# Altium PCB gen1.PcbDoc
Units mil, origin at the board's own origin, x right, y up, seen from the top; angles counter-clockwise.
Board outline 1413.32 x 1574.8 mil, 2 copper layers (Top Layer, Bottom Layer); 60 components, 48 nets, 279 pads, 102 vias.
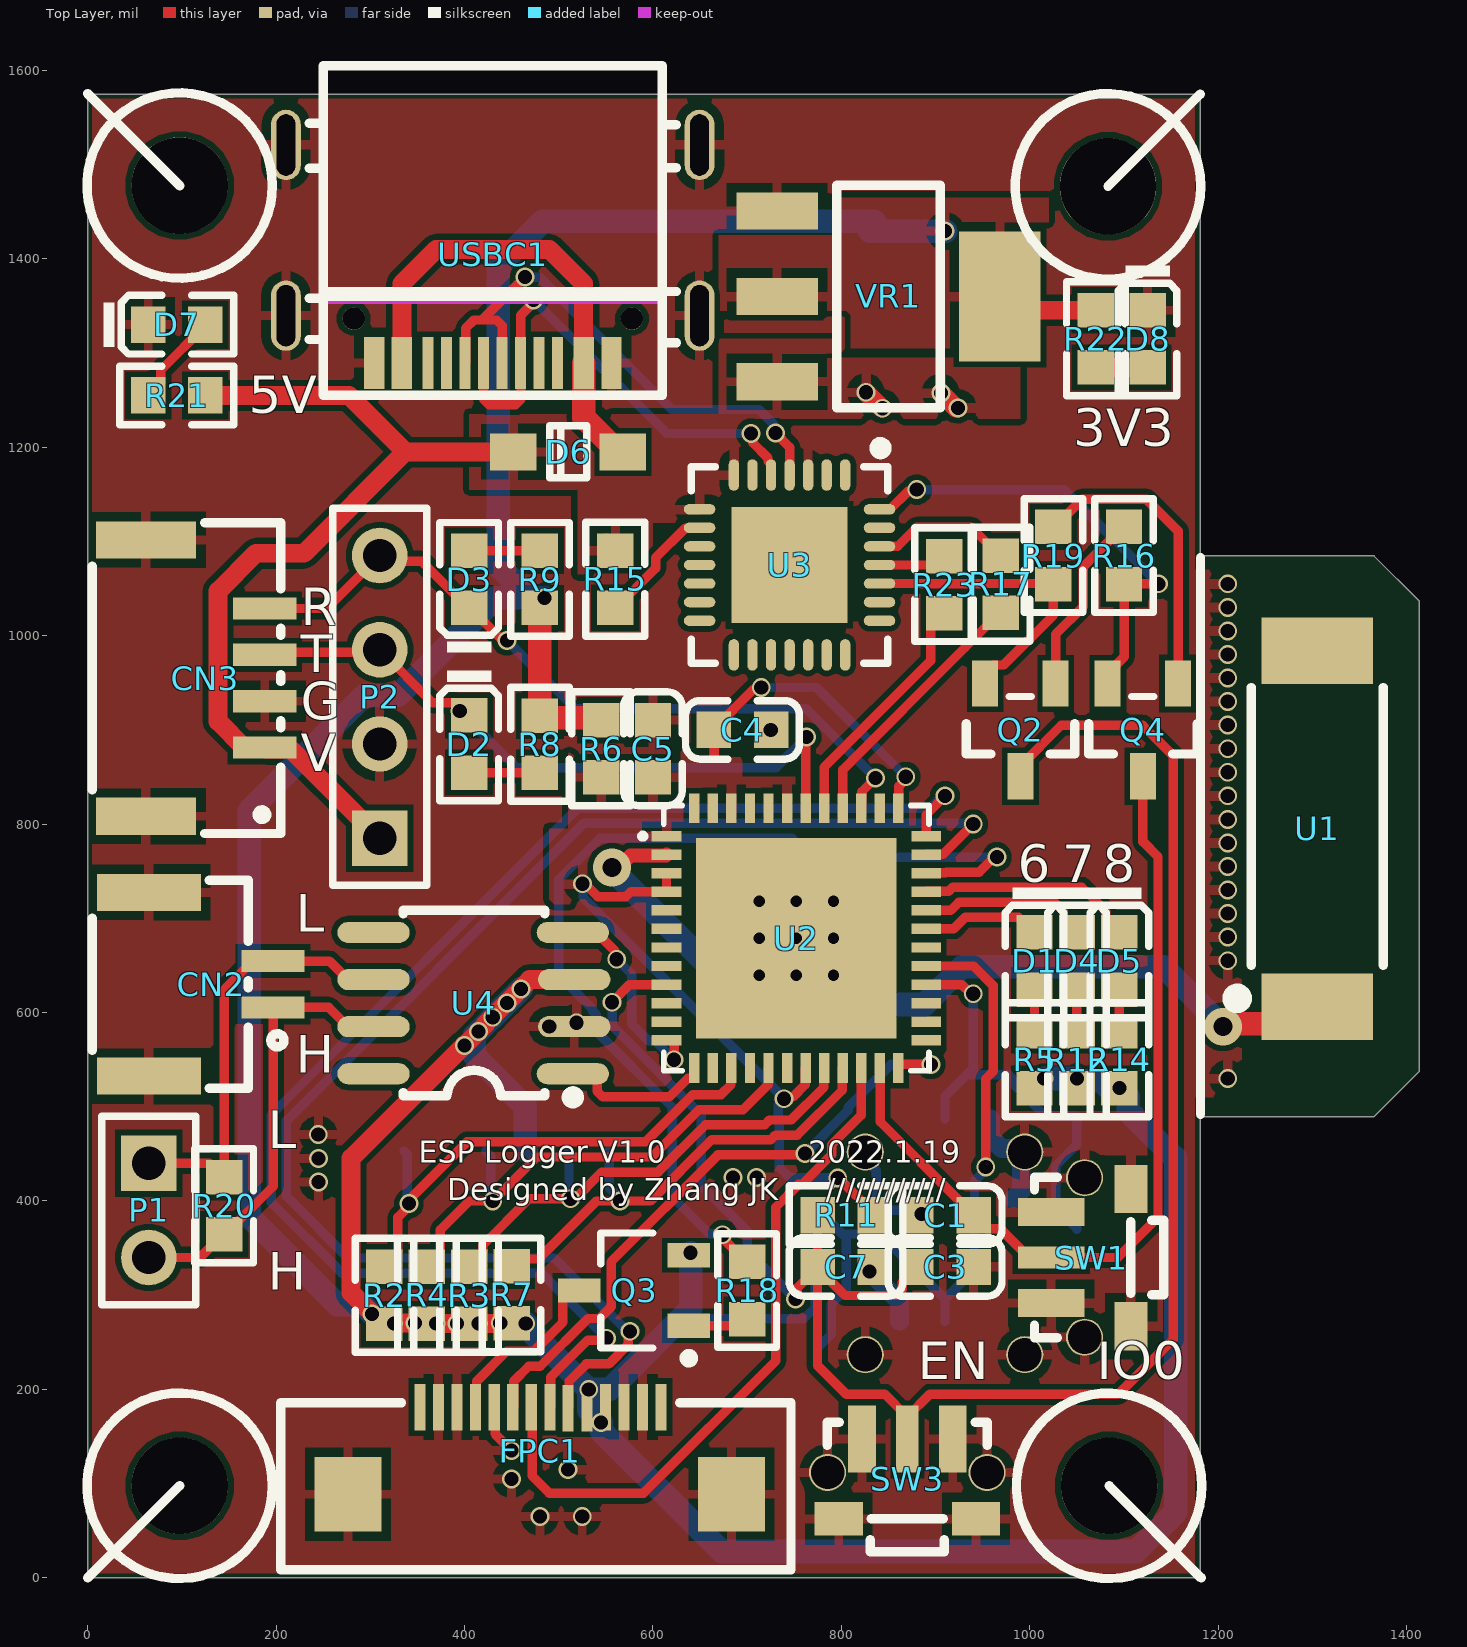
[diagram p0: Top Layer view]
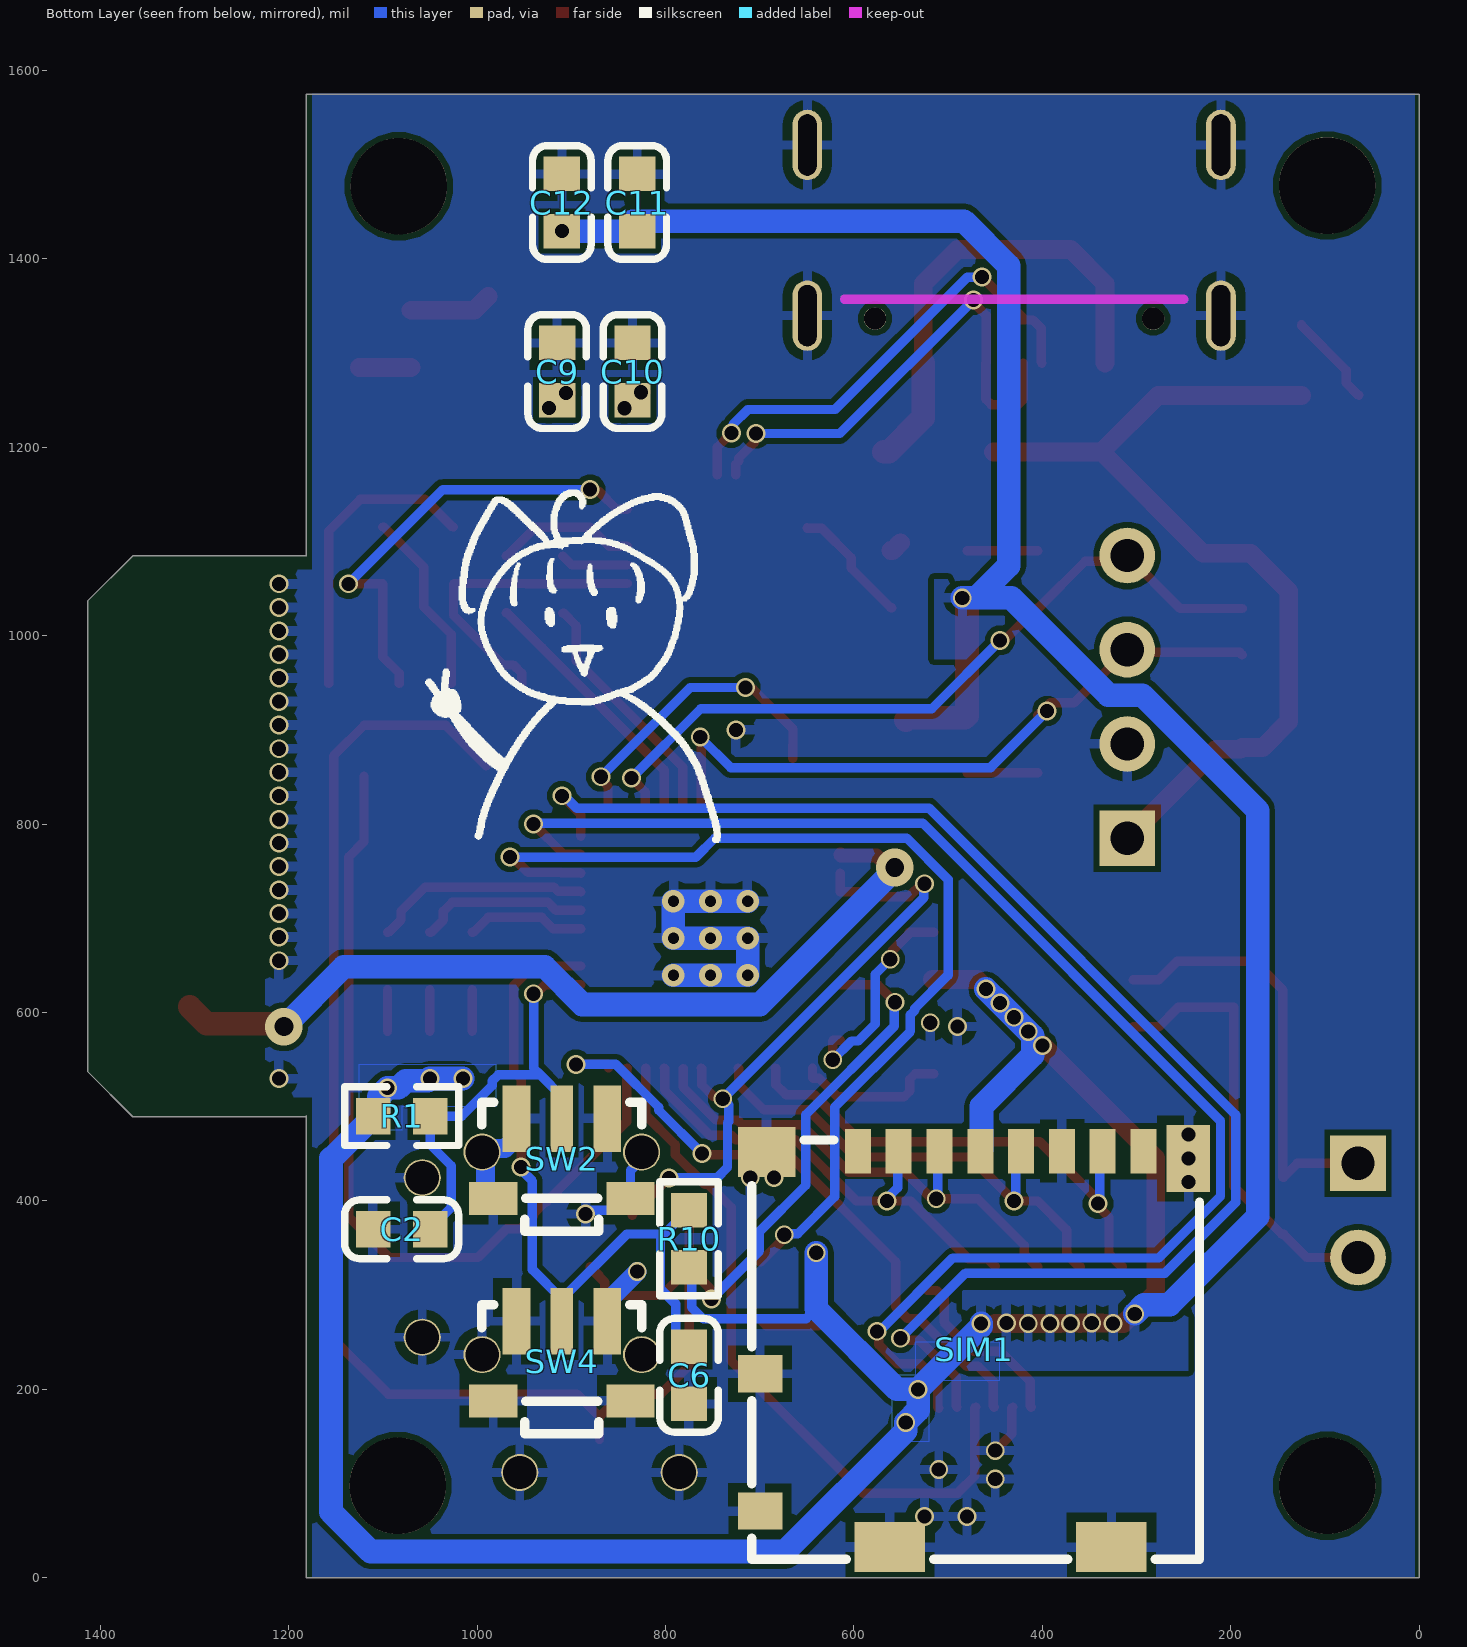
[diagram p1: Bottom Layer view, seen from below]
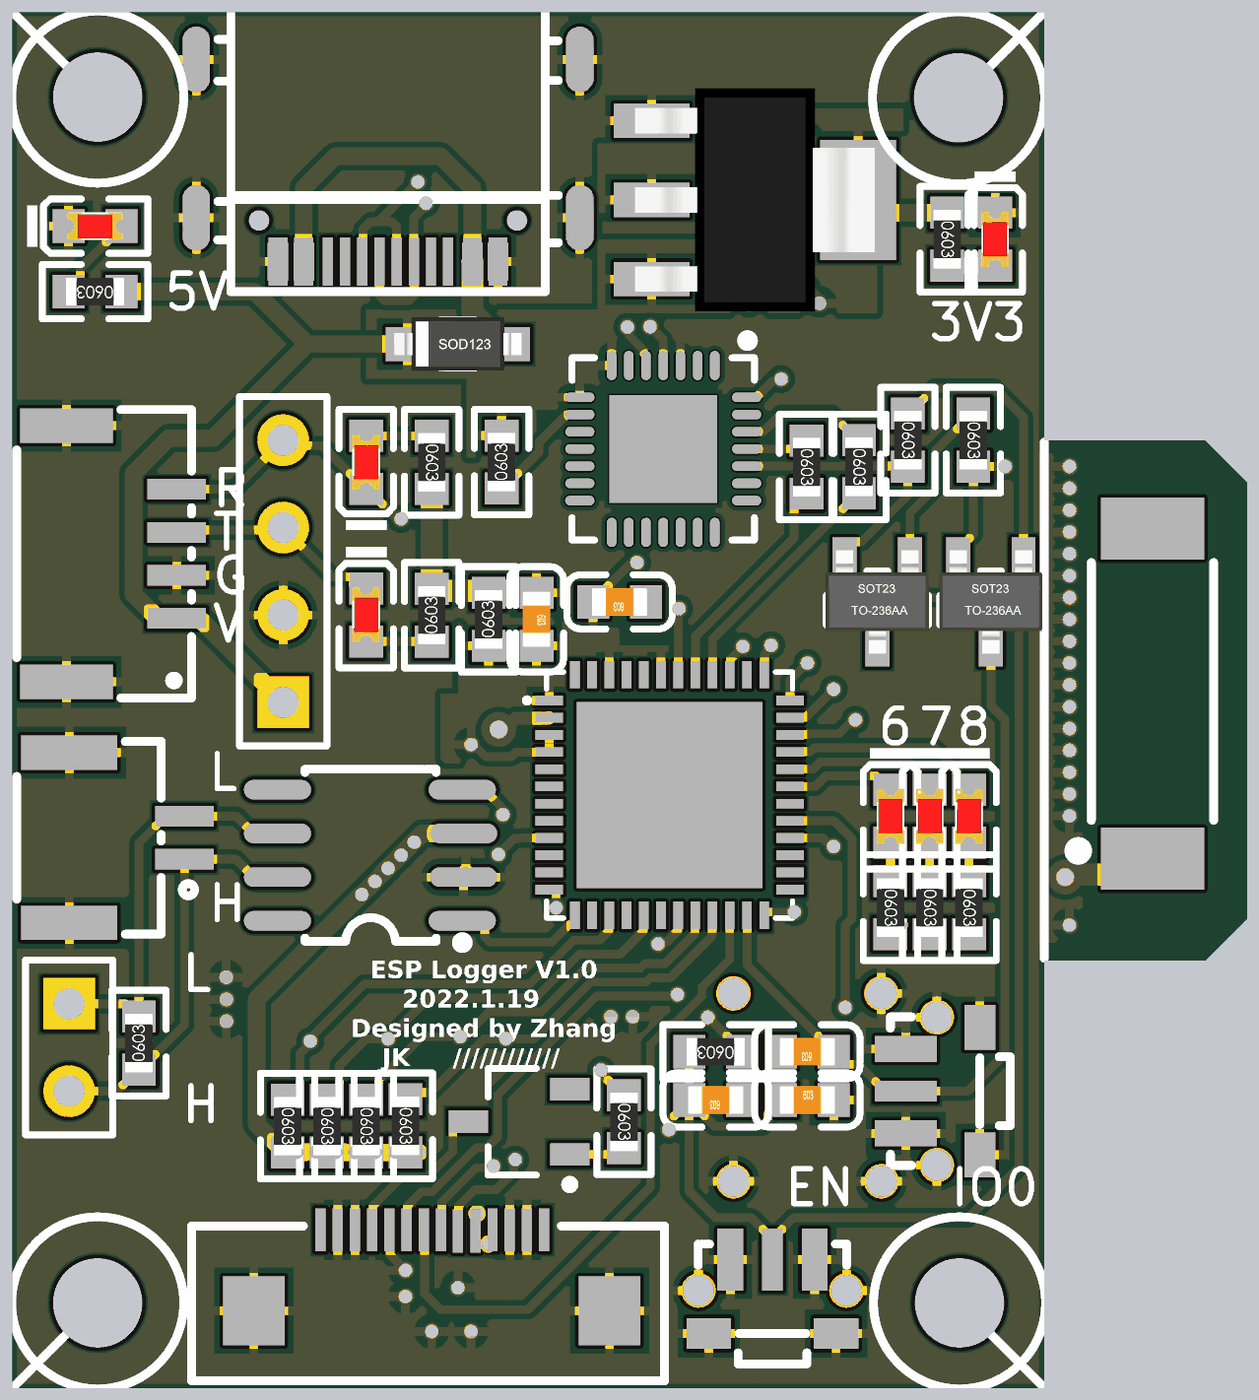
[diagram p2: 3D render of the assembled board from above, using the file's embedded part models]
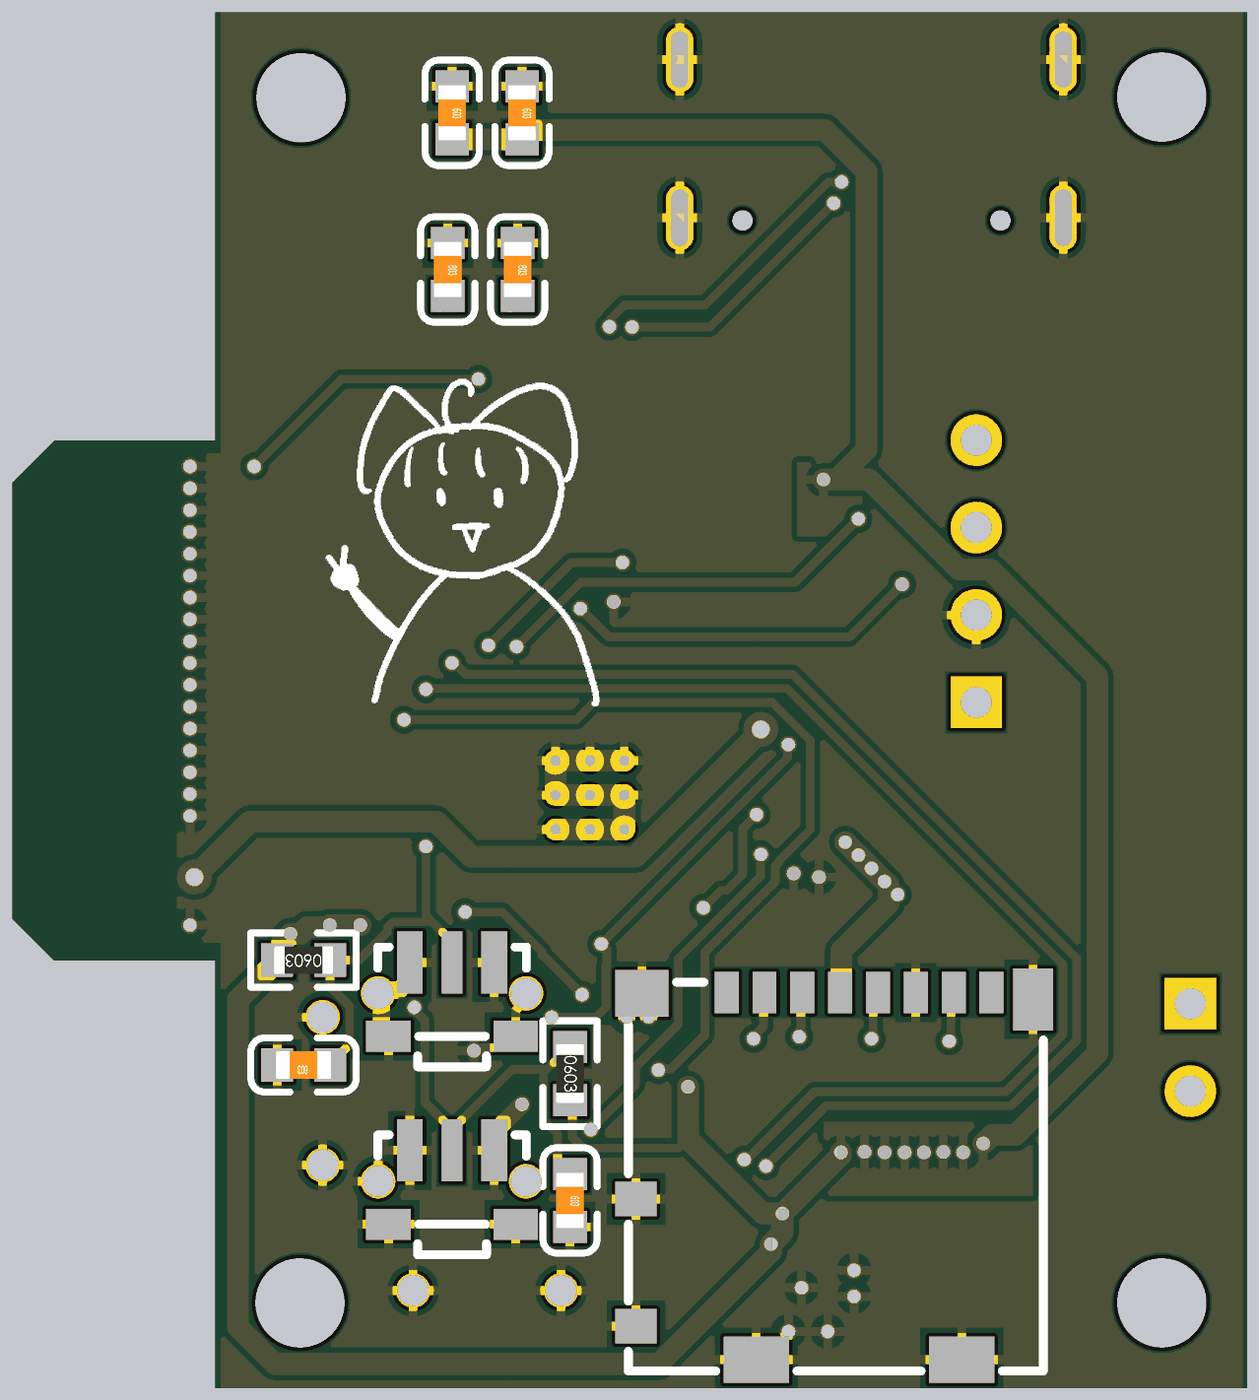
[diagram p3: 3D render of the assembled board from below, using the file's embedded part models]

## Layer stack, top to bottom
Top Solder: solder mask 0.4, Solder Resist, Dk 3.5
Top Layer: signal copper 1.4
Dielectric 1: dielectric 12.6, FR-4, Dk 4.8
Bottom Layer: signal copper 1.4
Bottom Solder: solder mask 0.4, Solder Resist, Dk 3.5

## Board outline
0,0 0,1574.8 1181.1,1574.8 1181.1,1084.61 1181.12,1084.59 1365.41,1084.59 1413.32,1036.68 1413.32,537.31 1365.41,489.4 1181.12,489.4 1181.1,490.67 1181.1,0

## Design rules (kind name [scope] priority, off if disabled: settings)
Clearance [All] p1: gap=6 ignorepadtopadclearanceinfootprint=FALSE
HoleSize [All] p1: absolutevalues=TRUE maxlimit=200 minlimit=1 maxpercent=80.000 minpercent=20.000
HoleToHoleClearance [All] p1: gap=6 allowstackedmicrovias=TRUE
MinimumSolderMaskSliver [All] p1: minsoldermaskwidth=-1
PolygonConnect [All] p1: connectstyle=Relief reliefconductorwidth=10 reliefentries=4 polygonreliefangle="90 Angle" airgapwidth=10
RoutingVias [All] p1: holewidth=10 width=20 viastyle="Through Hole" minholewidth=10 minwidth=20 maxholewidth=40 maxwidth=80
SilkToSilkClearance [All] p1: silktosilkclearance=-1
SilkToSolderMaskClearance [IsPad] p1: minsilkscreentomaskgap=-1 clearancetoexposedcopper=TRUE
SolderMaskExpansion [All] p1: expansion=4 istentingtop=FALSE
Width [All] p1: maxlimit=100 minlimit=8 preferedwidth=10
25 further rules are at their usual default settings.

## Components (designator, comment, footprint, x,y, rotation, side; value= is the part's Value field where it differs from the comment)
C1 "100nF (104) 10% 50V" 0603_C 910,385 r180 top
C2 "100nF" 0603_C 1080,370 r0 bottom
C3 "100nF (104) 10% 50V" 0603_C 910,330 r0 top
C4 "10uF" 0603_C 695,900 r180 top
C5 "100nF" 0603_C 600,880 r270 top
C6 "100nF" 0603_C 775,215 r270 bottom
C7 "100nF" 0603_C 805,330 r180 top
C9 "100nF" 0603_C 915,1280.32 r270 bottom
C10 "10uF" 0603_C 835,1280.32 r270 bottom
C11 "10uF" 0603_C 830,1459.68 r270 bottom
C12 "100nF" 0603_C 910,1459.68 r270 bottom
CN2 "M1257VS-02P" CONN-SMD_P1.25_M1257VS-02P 131,630 r270 top
CN3 "M1257RS-04P" CONN-SMD_M1257RS-04P 125,955 r270 top
D1 "红灯 0603" 0603_LED_S1 1005,654.69 r270 top
D2 "蓝灯 0603" 0603_LED_S1 405,885 r270 top
D3 "绿灯 0603" 0603_LED_S1 405,1059.68 r90 top
D4 "黄灯 0603" 0603_LED_S1 1050,654.69 r270 top
D5 "绿灯 0603" 0603_LED_S1 1095,654.69 r270 top
D6 "B5819W  SL" SOD-123 510,1195 r0 top
D7 "红灯 0603" 0603_LED_S1 94.68,1330 r0 top
D8 "红灯 0603" 0603_LED_S1 1125,1315 r270 top
FPC1 "F0502WR-S-14PNLNG1G00L" FPC-SMD_P0.50-14P_F0500WR-S 480,135 r180 top
P1 "Header 2" HDR1X2 65,440 r270 top
P2 "Header 4" HDR1X4 310,785 r90 top
Q2 "MMBT5551  G1" SOT-23(SOT-23-3) 990,900 r90 top
Q3 "AO3401A PMOS" SOT-23-3L 580,305 r0 top
Q4 "MMBT5551  G1" SOT-23(SOT-23-3) 1120,900 r90 top
R1 "1KΩ" 0603_R#1 1080,490 r0 bottom
R2 "10KΩ (1002) ±1%" 0603_R#1 315,300 r270 top
R3 "10KΩ (1002) ±1%" 0603_R#1 405,300 r270 top
R4 "10KΩ (1002) ±1%" 0603_R#1 360,300 r270 top
R5 "1KΩ" 0603_R#1 1005,550 r270 top
R6 "0Ω (0R0) ±1%" 0603_R#1 545,880 r90 top
R7 "10KΩ (1002) ±1%" 0603_R#1 450,300.32 r270 top
R8 "1KΩ (1001) ±1%" 0603_R#1 480,884.68 r90 top
R9 "1KΩ (1001) ±1%" 0603_R#1 480,1059.69 r270 top
R10 "1KΩ" 0603_R#1 775,360 r270 bottom
R11 "10KΩ (1002) ±1%" 0603_R#2 805,385 r180 top
R12 "1KΩ" 0603_R#1 1050,550 r270 top
R14 "1KΩ" 0603_R#1 1095,550 r270 top
R15 "10KΩ (1002) ±1%" 0603_R#1 560,1060 r90 top
R16 "12KΩ (1202) ±1%" 0603_R#1 1100,1085 r270 top
R17 "200Ω (2000) ±1%" 0603_R#1 969.06,1054.53 r270 top
R18 "1KΩ (1001) ±1%" 0603_R#1 700,305 r270 top
R19 "12KΩ (1202) ±1%" 0603_R#1 1025,1085 r270 top
R20 "120Ω (1200) ±1%" 0603_R#1 145,395 r90 top
R21 "1KΩ (1001) ±1%" 0603_R#1 94.69,1255 r180 top
R22 "1KΩ (1001) ±1%" 0603_R#1 1070,1315 r270 top
R23 "200Ω (2000) ±1%" 0603_R#1 909.06,1054.21 r270 top
SIM1 "MicroSD Socket" SIM-SMD_8P-1040310811 472.26,242.74 r0 bottom
SW1 "ST-1133" KEY-SMD_ST-1133 1065,340 r90 top
SW2 "ST-1133" KEY-SMD_ST-1133 910,445 r180 bottom
SW3 "ST-1133" KEY-SMD_ST-1133 870,105 r0 top
SW4 "ST-1133" KEY-SMD_ST-1133 910,230 r180 bottom
U1 "AN1003" ANT-SMD_L10.3-W3.0 1305,795 r90 top
U2 "ESP32-PICO-D4" QFN-48_L7.0-W7.0-P0.50-BL-EP5.4 752.21,678.89 r270 top
U3 "CP2102-GMR" QFN-28_5x5x05P 745,1075 r180 top
U4 "SN65HVD232DR" SOIC-8_L5.0-W4.0-P1.27-LS6.0-BL 410,610 r90 top
USBC1 "TYPE-C-31-M-14" USB-C-SMD_12P-P0.50-H-F_TYPE-C-31-M-14 430,1405 r180 top
VR1 "AMS1117-3.3" SOT-223 850,1360 r180 top

## Footprints (in the part's own frame and the unit in brackets; to place one, negate y for a bottom-side part, rotate by r counter-clockwise, add the part's x,y. Pads: shape width x height; smd on the part's side, far side on the other; paste and mask are expansions set on the pad)
0603_C [mm]
  rect 0.93x0.98 smd: 1(-0.77,0) 2(0.77,0)
  silkscreen extent -1.54,-0.79 1.54,0.79, body extent -0.8,-0.4 0.8,0.4, height 0.3
0603_LED_S1 [mm]
  rect 0.93x0.98 smd: A(0.77,0) K(-0.77,0)
  silkscreen extent -1.98,-0.79 1.54,0.79, body extent -0.8,-0.4 0.8,0.4, height 0.6
0603_R#1 [mm]
  rect 0.93x0.98 smd: 1(-0.77,0) 2(0.77,0)
  silkscreen extent -1.53,-0.79 1.54,0.79, body extent -0.85,-0.4 0.85,0.4, height 0.56
0603_R#2 [mm]
  rect 0.93x0.98 smd: 1(-0.77,0) 2(0.762,0)
  silkscreen extent -1.54,-0.79 1.54,0.79, body extent -0.85,-0.4 0.85,0.4, height 0.56
ANT-SMD_L10.3-W3.0 [mm]
  rect 1.8x3 smd: 1(-4.8,0) 2(4.8,0)
  silkscreen extent -4.77,-1.78 3.81,2.36
CONN-SMD_M1257RS-04P [mm]
  rect 0.6x1.7 smd: 1(1.875,1.6) 2(0.625,1.6) 3(-0.625,1.6) 4(-1.875,1.6)
  rect 1x2.7 smd: 5(-3.725,-1.6) 6(3.725,-1.6)
  silkscreen extent -4.19,-3.05 4.19,2.03
CONN-SMD_P1.25_M1257VS-02P [mm]
  rect 0.6x1.7 smd: 1(0.625,1.675) 2(-0.625,1.675)
  rect 1x2.8 smd: 3(-2.475,-1.675) 4(2.475,-1.675)
  silkscreen extent -2.8,-3.2 2.8,1.97
FPC-SMD_P0.50-14P_F0500WR-S [mm]
  rect 0.3x1.25 smd: 1(3.231,-1.175) 2(2.731,-1.175) 3(2.231,-1.175) 4(1.731,-1.175) 5(1.231,-1.175) 6(0.731,-1.175) 7(0.231,-1.175) 8(-0.269,-1.175) 9(-0.762,-1.143) 10(-1.27,-1.143) 11(-1.769,-1.175) 12(-2.269,-1.175) 13(-2.769,-1.175) 14(-3.269,-1.175)
  rect 1.8x2 smd: 15(5.169,1.175) 16(-5.169,1.175)
  silkscreen extent -6.77,-1.29 6.98,3.21
HDR1X2 [mm] "Connector; Header; 2 Position"
  rect 1.5x1.5 hole 0.9: 1(0,0)
  round 1.5 hole 0.9: 2(2.54,0)
  silkscreen extent -1.27,-1.27 3.81,1.27
HDR1X4 [mm] "Connector; Header; 4 Position"
  rect 1.5x1.5 hole 0.9: 1(0,0)
  round 1.5 hole 0.9: 2(2.54,0) 3(5.08,0) 4(7.62,0)
  silkscreen extent -1.27,-1.27 8.89,1.27
KEY-SMD_ST-1133 [mm]
  round 1 hole 0.9: 1(-2.15,0.175) 3(2.15,0.175)
  rect 1.3x0.9 smd: 1(-1.85,-1.075) 3(1.85,-1.075)
  rect 0.75x1.8 smd: 1(-1.225,1.075) 3(1.225,1.075)
  rect 0.6x1.8 smd: 2(0,1.075)
  silkscreen extent -2.16,-1.96 2.16,1.52
QFN-28_5x5x05P [mm]
  rect 3.13x3.13 smd mask+0.051: 0(0,0)
  oval 0.28x0.85 smd mask+0.051: 1(-1.5,-2.425) 2(-1,-2.425) 3(-0.5,-2.425) 4(0,-2.425) 5(0.5,-2.425) 6(1,-2.425) 7(1.5,-2.425) 15(1.5,2.425) 16(1,2.425) 17(0.5,2.425) 18(0,2.425) 19(-0.5,2.425) 20(-1,2.425) 21(-1.5,2.425)
  oval 0.85x0.28 smd mask+0.051: 8(2.425,-1.5) 9(2.425,-1) 10(2.425,-0.5) 11(2.425,0) 12(2.425,0.5) 13(2.425,1) 14(2.425,1.5) 22(-2.425,1.5) 23(-2.425,1) 24(-2.425,0.5) 25(-2.425,0) 26(-2.425,-0.5) 27(-2.425,-1) 28(-2.425,-1.5)
  silkscreen extent -2.65,-3.3 2.65,2.65
QFN-48_L7.0-W7.0-P0.50-BL-EP5.4 [mm]
  rect 0.28x0.8 smd: 1(-2.75,-3.5) 2(-2.25,-3.5) 3(-1.75,-3.5) 4(-1.25,-3.5) 5(-0.75,-3.5) 6(-0.25,-3.5) 7(0.25,-3.5) 8(0.75,-3.5) 9(1.25,-3.5) 10(1.75,-3.5) 11(2.25,-3.5) 12(2.75,-3.5) 25(2.75,3.5) 26(2.25,3.5) 27(1.75,3.5) 28(1.25,3.5) 29(0.75,3.5) 30(0.25,3.5) 31(-0.25,3.5) 32(-0.75,3.5) 33(-1.25,3.5) 34(-1.75,3.5) 35(-2.25,3.5) 36(-2.75,3.5)
  rect 0.8x0.28 smd: 13(3.5,-2.75) 14(3.5,-2.25) 15(3.5,-1.75) 16(3.5,-1.25) 17(3.5,-0.75) 18(3.5,-0.25) 19(3.5,0.25) 20(3.5,0.75) 21(3.5,1.25) 22(3.5,1.75) 23(3.5,2.25) 24(3.5,2.75) 37(-3.5,2.75) 38(-3.5,2.25) 39(-3.5,1.75) 40(-3.5,1.25) 41(-3.5,0.75) 42(-3.5,0.25) 43(-3.5,-0.25) 44(-3.5,-0.75) 45(-3.5,-1.25) 46(-3.5,-1.75) 47(-3.5,-2.25) 48(-3.5,-2.75)
  rect 5.4x5.4 smd: 49(0,0)
  silkscreen extent -3.58,-4.21 3.58,3.58
SIM-SMD_8P-1040310811 [mm]
  rect 0.7x1.2 smd: 1(3.138,-5.338) 2(2.038,-5.338) 3(0.938,-5.338) 4(-0.162,-5.338) 5(-1.262,-5.338) 6(-2.362,-5.338) 7(-3.462,-5.338) 8(-4.562,-5.337)
  rect 1.17x1.8 smd: 9(-5.772,-5.138)
  rect 1.55x1.35 smd: 10(5.598,-5.312)
  rect 1.2x1 smd: 11(5.773,0.663) 12(5.773,4.362)
  rect 1.9x1.35 smd: 13(2.273,5.337) 14(-3.697,5.337)
  silkscreen extent -6.07,-5.64 5.99,5.66
SOD-123 [mm]
  rect 1.25x1 smd: 1(1.475,0) 2(-1.475,0)
  silkscreen extent -0.5,-0.7 0.5,0.7, body extent -1.85,-0.77 1.85,0.78, height 1.35
SOIC-8_L5.0-W4.0-P1.27-LS6.0-BL [mil]
  oval 22.38x76.78 smd: 1(-75,-105) 2(-25,-106.5) 3(25,-106.5) 4(75,-105) 5(75,106.5) 6(25,106.5) 7(-25,106.5) 8(-75,106.5)
  silkscreen extent -106,-111 98,75
SOT-23(SOT-23-3) [mm]
  rect 1.25x0.7 smd: 1(1.25,-0.95) 2(1.25,0.95) 3(-1.25,0)
  silkscreen extent -0.65,-1.46 0.9,1.46, body extent -1.5,-1.5 1.5,1.5, height 1.3
SOT-23-3L [mm] "http://www.aosmd.com/res/packaging_information/SOT-23-3L.pdf"
  rect 1.15x0.65 smd: 1(1.475,-0.95) 2(1.475,0.95) 3(-1.475,0)
  silkscreen extent -0.9,-1.95 1.6,1.55, body extent -0.9,-1.55 0.9,1.55, height 1.25
SOT-223 [mm]
  rect 2.2x1 smd: 1(3,-2.3) 2(3,0) 3(3,2.3)
  rect 2.2x3.5 smd: 2(-3,0)
  silkscreen extent -1.4,-3 1.4,3, body extent -3.49,-3.24 3.49,3.24, height 1.64
USB-C-SMD_12P-P0.50-H-F_TYPE-C-31-M-14 [mm]
  rect 0.55x1.4 smd: A1B12(-3.2,2.94) A4B9(-2.45,2.94) B1A12(3.2,2.94) B4A9(2.45,2.94)
  rect 0.3x1.4 smd: A5(-1.249,2.94) A6(-0.251,2.94) A7(0.25,2.94) A8(1.25,2.94) B5(1.75,2.94) B6(0.75,2.94) B7(-0.751,2.94) B8(-1.749,2.94)
  oval 0.8x1.9 hole 0.5 slot 1.65 at 90 deg: S(-5.575,-2.94) S(-5.575,1.66) S(5.575,-2.94) S(5.575,1.66)
  round 0.6 hole 0.6 unplated: ""(-3.75,1.74) ""(3.75,1.74)
  Keep-Out Layer lines w0.254: 4.572,1.215 4.445,1.215 -4.572,1.215
  silkscreen extent -4.95,-5.08 4.95,3.81

## Part data
C1 C2 C3 C5 C6 C7 C9 C12: library part "0603 100nF (104) 10% 50V", "贴片电容", Package=0603, SuppliersPartNumber=C14663, ComponentLink1Description=供应商链接, ComponentLink1URL=http://www.szlcsc.com/product/details_15331.html, Supplier=LC
C4 C10 C11: library part "0603 10uF (106) 10% 10V", "贴片电容", Package=0603, SuppliersPartNumber=C19702, ComponentLink1Description=供应商链接, ComponentLink1URL=http://www.szlcsc.com/product/details_20411.html, Supplier=LC
CN2 CN3: BOM_JLCPCB Part Class="Extended Part", BOM_Manufacturer=XFCN, BOM_Supplier=LCSC, Contributor=LCSC, spicePre=C
  CN2: BOM_Manufacturer Part=M1257VS-02P, BOM_Supplier Part=C541819, spiceSymbolName=M1257VS-02P
  CN3: BOM_Manufacturer Part=M1257RS-04P, BOM_Supplier Part=C541828, spiceSymbolName=M1257RS-04P
D1 D7 D8: library part "0603 红灯", "发光二极管", Package=0603, SuppliersPartNumber=C2286, ComponentLink1Description=供应商链接, ComponentLink1URL=http://www.szlcsc.com/product/details_2659.html, Supplier=LC
D2: library part "0603 蓝灯", "发光二极管", Package=0603, SuppliersPartNumber=C72041, ComponentLink1Description=供应商链接, ComponentLink1URL=http://www.szlcsc.com/product/details_73150.html, Supplier=LC
D3 D5: library part "0603 绿灯", "发光二极管", Package=0603, SuppliersPartNumber=C72043, ComponentLink1Description=供应商链接, ComponentLink1URL=http://www.szlcsc.com/product/details_73152.html, Supplier=LC
D4: library part "0603 黄灯", "发光二极管", Package=0603, SuppliersPartNumber=C72038, ComponentLink1Description=供应商链接, ComponentLink1URL=http://www.szlcsc.com/product/details_73147.html, Supplier=LC
D6: library part "SOD-123 B5819W  SL", "肖特基二极管", Package=SOD-123, SuppliersPartNumber=C8598, ComponentLink1Description=供应商链接, ComponentLink1URL=http://www.szlcsc.com/product/details_9093.html, Supplier=LC
FPC1: BOM_JLCPCB Part Class="Extended Part", BOM_Manufacturer="Joint Tech Elec", BOM_Manufacturer Part=F0502WR-S-14PNLNG1G00L, BOM_Supplier=LCSC, BOM_Supplier Part=C247902, Contributor=LCSC, spicePre=F, spiceSymbolName=F0502WR-S-14PNLNG1G00L
P1: "Header, 2-Pin", LatestRevisionDate=17-Jul-2002, LatestRevisionNote="Re-released for DXP Platform.", Publisher="Altium Limited"
P2: "Header, 4-Pin", LatestRevisionDate=17-Jul-2002, LatestRevisionNote="Re-released for DXP Platform.", Publisher="Altium Limited"
Q2 Q4: library part "SOT-23 MMBT5551  G1", "三极管", Package=SOT-23, SuppliersPartNumber=C2145, ComponentLink1Description=供应商链接, ComponentLink1URL=http://www.szlcsc.com/product/details_2502.html, Supplier=LC
Q3: library part "AO3401A P道沟 X13A15 SOT-23", "MOS(场效应管)", Package=SOT-23, SuppliersPartNumber=C15127, ComponentLink1Description=供应商链接, ComponentLink1URL=http://www.szlcsc.com/product/details_15801.html, Supplier=LC
R1 R5 R8 R9 R10 R12 R14 R18 R21 R22: library part "0603 1KΩ (1001) 1%", "贴片电阻", Package=0603, SuppliersPartNumber=C21190, ComponentLink1Description=供应商链接, ComponentLink1URL=http://www.szlcsc.com/product/details_21904.html, Supplier=LC
R2 R3 R4 R7 R11 R15: library part "0603 10KΩ (1002) 1%", "贴片电阻", Package=0603, SuppliersPartNumber=C25804, ComponentLink1Description=供应商链接, ComponentLink1URL=http://www.szlcsc.com/product/details_26547.html, Supplier=LC
R6: library part "0603 0Ω (0R0) 1%", "贴片电阻", Package=0603, SuppliersPartNumber=C21189, ComponentLink1Description=供应商链接, ComponentLink1URL=http://www.szlcsc.com/product/details_21903.html, Supplier=LC
R16 R19: library part "0603 12KΩ (1202) 1%", "贴片电阻", Package=0603, SuppliersPartNumber=C22790, ComponentLink1Description=供应商链接, ComponentLink1URL=http://www.szlcsc.com/product/details_23517.html, Supplier=LC
R17 R23: library part "0603 200Ω (2000) 1%", "贴片电阻", Package=0603, SuppliersPartNumber=C8218, ComponentLink1Description=供应商链接, ComponentLink1URL=http://www.szlcsc.com/product/details_8708.html, Supplier=LC
R20: library part "0603 120Ω (1200) 1%", "贴片电阻", Package=0603, SuppliersPartNumber=C22787, ComponentLink1Description=供应商链接, ComponentLink1URL=http://www.szlcsc.com/product/details_23514.html, Supplier=LC
SIM1: library part 1040310811, BOM_JLCPCB Part Class="Extended Part", BOM_Manufacturer=MOLEX, BOM_Manufacturer Part=1040310811, BOM_Supplier=LCSC, BOM_Supplier Part=C585350, Contributor=LCSC, spicePre=S, spiceSymbolName=1040310811
SW1 SW2 SW3 SW4: BOM_JLCPCB Part Class="Extended Part", BOM_Manufacturer="RI SHENG", BOM_Manufacturer Part=ST-1133, BOM_Supplier=LCSC, BOM_Supplier Part=C589182, Contributor=LCSC, spicePre=S, spiceSymbolName=ST-1133
U1: BOM_JLCPCB Part Class="Extended Part", BOM_Manufacturer="Rainsun microwave Tech", BOM_Manufacturer Part=AN1003, BOM_Supplier=LCSC, BOM_Supplier Part=C239240, Contributor=LCSC, spicePre=U, spiceSymbolName=AN1003
U2: BOM_JLCPCB Part Class="Extended Part", BOM_Manufacturer="Espressif Systems", BOM_Manufacturer Part=ESP32-PICO-D4, BOM_Supplier=LCSC, BOM_Supplier Part=C193707, Contributor=LCSC, spicePre=U, spiceSymbolName=ESP32-PICO-D4
U3: library part CP2102-GMR_[C6568], "USB", Package=QFN-28_5x5x05P, SuppliersPartNumber=C6568, ComponentLink1Description=供应商链接, ComponentLink1URL=http://www.szlcsc.com/product/details_7033.html, Supplier=LC
U4: BOM_JLCPCB Part Class="Extended Part", BOM_Manufacturer=TI, BOM_Manufacturer Part=SN65HVD232DR, BOM_Supplier=LCSC, BOM_Supplier Part=C30530, spicePre=U, spiceSymbolName=SN65HVD232DR
USBC1: BOM_JLCPCB Part Class="Extended Part", BOM_Manufacturer="Rectangular Connectors - Contacts", BOM_Manufacturer Part=TYPE-C-31-M-14, BOM_Supplier=LCSC, BOM_Supplier Part=C223907, Contributor=LCSC, spicePre=U, spiceSymbolName=TYPE-C-31-M-14
VR1: library part "SOT-223 AMS1117-3.3", "低压差线性稳压(LDO)", Package=SOT-223, SuppliersPartNumber=C6186, ComponentLink1Description=供应商链接, ComponentLink1URL=http://www.szlcsc.com/product/details_6652.html, Supplier=LC

## Free pads (board coordinates)
  round 102.36 hole 102.36 unplated: M(97.69,97.69) M(97.69,1477.69) M(1082.97,1476.87) M(1084.11,97.69)

## Via types
v1: diameter 20/20 (per signal layer), hole 15, Top Layer to Bottom Layer, tented both sides, 91 vias
v2: diameter 24.02, hole 12, Top Layer to Bottom Layer, 9 vias
v3: diameter 40/40 (per signal layer), hole 20, Top Layer to Bottom Layer, 2 vias

## Nets (pads, with @x,y where several pads share a name; then routed paths per layer and width w, separated by ;. In a path a pad name is that pad's centre, name@x,y a point inside that pad or via, vN(x,y) a via of type N, cw(c..) or ccw(c..) an arc to the next point about the centre after c; other vN are vias at no path point)
+3.3: C11.2 C12.2 FPC1.10 FPC1.11 Q3.2 R1.2 R2.2 R3.2 R4.2 R5.2 R6.2 R7.2 R8.2 R9.2 R10.2 R12.2 R14.2 R22.1 SIM1.4 U4.3 VR1.2 | length 4797.3
  Top Layer w10: R8.2@476.67,912.66 R8.2@482.34,912.66
  Top Layer w20: R4.2 359.26,270.43 336.7,270.43 336.49,270.22 325.53,270.22 325,269.68 314.02,269.68 303.57,280.12 v1(302.01,280.12) 279.71,302.43 279.71,445.56 399.58,565.42 400.42,565.42 422.29,587.29 422.29,588.14 469.15,635 U4.3 ; R4.2@360,270.22 380.89,270.22 381.13,269.98 405.02,269.98 405.16,269.84 415,269.84 437.92,269.84 449.84,269.84 R7.2 ; R3.2@395,269.68 R3.2 ; VR1.2@988.11,1360 1002.8,1345.31 R22.1
  Top Layer w25: R9.2 R8.2 482.34,912.66 542.66,912.66 R6.2
  Bottom Layer w10: 640,285.72 650.72,275 759.99,275 772.29,287.3 772.29,326.98 R10.2
  Bottom Layer w25: v1(302.01,280.12) 292.14,290 265,290 171.47,383.53 171.47,814.39 294.05,936.97 329.89,936.97 432.92,1040 470,1040 ; v1(460,625) v1(445,610) 410.36,575.36 410.36,554.64 464.59,500.41 464.59,454.15 SIM1.4 ; v1(465,270) 465,266.91 v1(531.91,200) ; v1(485,1040) 470,1040 ; v1(640,345) 640,285.72 554.28,200 v1(531.91,200) ; C11.2 C12.2@910.98,1429.37 ; C11.2@835,1440 483.3,1440 435.7,1392.4 435.7,1074.3 470,1040 ; v1(1015,530) v1(1050,530) 1052.21,527.79 1075.66,527.79 1083.45,520 v1(1095,520) 1104.51,510.49 1104.51,495.81 R1.2 1110.32,489.02 1153.98,445.36 1155,445.36 1155,70.04 1112.97,28.01 673.03,28.01 545,156.04 v1(545,165) 531.91,178.09 v1(531.91,200)
  other v1: 325,270 347.65,270.43 370,270 392.02,269.98 415,270 437.92,270.61 400,565 415,580 430,595 910,1429.37
+3.3A: C4.2 C5.2 R6.1 R11.1 U2.1 U2.3 U2.4 U2.19 U2.37 U2.43 U2.46 | length 1006.6
  Top Layer w10: v1(525.1,736.62) 527.81,736.62 541.43,723 571.43,723 576.54,728.11 U2.4 U2.3 ; 665,870 664.69,900.98 706.79,943.09 713.09,943.09 v1(715,945) ; v1(739.18,508.56) 741.09,510.47 748.55,510.47 761.54,523.46 761.54,540.59 U2.19 ; v1(796.11,424.52) 796.78,424.52 835.31,385.98 R11.1 ; U2.37 860.99,817.21 860.99,840.15 868.38,847.54 v1(868.38,850.25)
  Bottom Layer w10: v1(525.1,736.62) 525.79,735.93 525.79,721.95 v1@738.49,509.25 ; v1(715,945) 773.62,945 v1(868.38,850.25) ; v1(739.18,508.56) 732.81,502.19 732.81,484.36 734.15,483.02 734.15,435.85 745.48,424.52 v1(796.11,424.52)
+5: C9.2 C10.2 CN3.1 D6.2 P2.1 R15.2 R21.1 U3.7 U3.8 VR1.3 | length 1036
  Top Layer w20: R21.1 277.26,1255 337.26,1195 ; P2.1 215.62,879.38 189.8,879.38 CN3.1 166.34,881.19 138.53,909 138.53,1047.26 178.7,1087.43 229.69,1087.43 337.26,1195 ; D6.2 337.26,1195 ; R15.2@550.71,1098.62 559.02,1090.32 R15.2 R15.2@560.98,1090.32 ; v1(825.99,1258.29) 842.93,1241.35 v1(843.64,1241.35) ; v1(905.6,1257.63) 921.6,1241.63 v1(923.8,1241.63)
BTN1: C2.1 R1.1 SW2.2 U2.28 | length 475.4
  Top Layer w10: U2.28 927.6,629.69 937.29,620 v1(940,620)
  Bottom Layer w10: SW2.2 910,510.95 932.81,533.76 ; v1(940,620) 940,540.95 932.81,533.76 ; C2.1 1049.69,370.98 1027.42,393.25 1027.42,437.36 1049.69,459.62 R1.1 1016.38,490 983.99,522.39 983.99,527.32 977.55,533.76 932.81,533.76
BTN2: C6.1 R10.1 SW4.2 U2.29 | length 774.1
  Top Layer w10: U2.29 940.33,649.37 961,628.7 961,537.51 953.27,529.78 v1(953.27,435.89)
  Bottom Layer w10: R10.1 775.98,390.31 801.3,365 ; C6.1@781,251.31 C6.1 775.98,245.31 789.29,258.62 789.29,290.82 805.29,306.82 805.29,361.01 801.3,365 ; SW4.2 SW4.2@910,295.95 ; v1(953.27,435.89) 953.27,433.19 941.24,421.15 941.24,327.19 SW4.2@910,295.95 ; 801.3,365 840.95,365 SW4.2@910,295.95
CAN_H: CN2.1 P1.2 R20.1 U4.7 | length 468
  Top Layer w10: P1.2 119.33,340 144.02,364.69 R20.1 145.98,364.69 196.94,415.64 CN2.1 255.9,605.4 276.3,585 U4.7
CAN_L: CN2.2 P1.1 R20.2 U4.6 | length 464.3
  Top Layer w10: P1.1 129.33,440 144.02,425.32 R20.2 145,624.32 175.29,654.61 CN2.2 256.69,654.61 276.3,635 U4.6
CAN_Rx: U2.12 U4.4 | length 227.5
  Top Layer w10: U4.4 541.1,685 541.1,683.88 559.61,665.37 559.61,658.43 v1(561.52,656.52) ; U2.12 621.92,570.63 622.43,570.12 v1(622.43,549.89)
  Bottom Layer w10: v1(561.52,656.52) 577.44,640.6 577.44,587.81 595.44,569.81 602.52,569.81 v1(622.43,549.89)
CAN_Tx: U2.13 U4.1 | length 165.2
  Top Layer w10: U4.1 534.99,535 540.71,529.28 540.71,516.47 546.57,510.61 617.48,510.61 637.22,530.35 643.43,530.35 643.94,530.87 U2.13
D+: U3.4 USBC1.A6 USBC1.B6 | length 575.9
  Top Layer w10: USBC1.B6 401.38,1290.16 401.38,1326.38 410,1335 418.6,1335 ; USBC1.A6 439.87,1329.14 434.01,1335 418.6,1335 ; v1(464.2,1380.6) 418.6,1335 ; v1(730,1215) 745,1200 U3.4
  Bottom Layer w10: v1(464.2,1380.6) 464.28,1380.52 479.48,1380.52 620,1240 712.57,1240 728.09,1224.49 728.09,1216.91 v1(730,1215)
D-: U3.5 USBC1.A7 USBC1.B7 | length 536.6
  Top Layer w10: USBC1.A7 420.17,1250.86 426.03,1245 454.14,1245 460,1250.86 460,1288.82 USBC1.B7 459.57,1339.83 473.26,1353.52 v1(473.26,1356.23) ; v1(704,1214.53) 705.92,1212.61 705.92,1204.76 722.14,1188.53 722.14,1185.14 725.32,1181.97 U3.5
  Bottom Layer w10: v1(473.26,1356.23) 614.96,1214.53 v1(704,1214.53)
DTR: Q4.2 R16.2 U3.28 | length 495.2
  Top Layer w10: U3.28 851.69,1134.06 870.72,1153.09 878.09,1153.09 v1(880,1155) ; Q4.2 1082.6,960.04 1100,977.44 R16.2 1100.32,1055 v1(1136.4,1055)
  Bottom Layer w10: v1(880,1155) 1036.4,1155 v1(1136.4,1055)
EN: C3.1 C7.2 Q2.3 R11.2 SW3.2 U2.9 | length 2084
  Top Layer w10: v1(556.44,610.98) 574.74,629.28 580.56,629.28 580.97,629.69 U2.9 ; v1(751.29,296) 753.2,297.91 753.2,307.53 C7.2@774.69,329.02 ; R11.2 774.69,384.69 C7.2 ; SW3.2 SW3.2@870,170.95 ; C3.1@870,320.32 C3.1 879.69,329.02 864.62,313.95 864.62,306.15 858.18,299.71 803.99,299.71 C7.2@774.69,329.02 ; Q2.3@990,861.61 1033.39,905 1119.73,905 1152.04,872.69 1152.04,253.02 1094.02,195 894.05,195 SW3.2@870,170.95 ; C7.2@774.69,329.02 C7.2 ; C7.2@774.69,329.02 774.69,225.32 805,195 845.95,195 SW3.2@870,170.95 ; C7.2@774.69,329.02 C7.2
  Bottom Layer w10: v1(556.44,610.98) 557,610.42 557,585.63 651.13,491.5 651.13,416.71 700.25,367.58 700.25,347.04 v1(751.29,296)
GND: C1.2 C2.2 C3.2 C4.1 C5.1 C6.2 C7.1 C9.1 C10.1 C11.1 C12.1 CN2.3 CN2.4 CN3.2 CN3.5 CN3.6 D7.K D8.K FPC1.2 FPC1.3 FPC1.5 FPC1.12 FPC1.13 FPC1.15 FPC1.16 P2.2 SIM1.6 SIM1.9 SIM1.10 SIM1.11 SIM1.12 SIM1.13 SIM1.14 SW1.1 SW1.3 SW2.1 SW2.3 SW3.1 SW3.3 SW4.1 SW4.3 U2.49 U3.3 U4.2 USBC1.A1B12 USBC1.B1A12 USBC1.S VR1.1 | length 661
  Top Layer w10: FPC1.5 432.45,180.36 432.45,152.8 450,135.25 v1(450,135)
  Bottom Layer w10: SW2.3@825.35,451.89 825.35,444.28 837.16,432.47 837.16,402.68 849.88,389.96 878.69,389.96 882.29,386.35 v1(885,386.35)
  Bottom Layer w20: v1(830,325) 830,324.77 861.77,293 SW4.3@861.77,272.33 ; SW2.1@958.23,487.33 958.23,466.66 962.99,461.89 964.04,461.89 970.34,455.6 990.94,455.6 994.65,451.89 990.94,448.19 990.94,410.39 983.23,402.68 SW2.1@982.83,402.68
  Bottom Layer w25: v2(712.83,718.27) v2(752.21,718.27) v2(791.58,718.26) ; v2(791.58,639.52) v2(752.21,639.53) v2(712.83,639.53) v2(712.83,678.9) v2(752.21,678.9) v2(791.58,678.9) v2(791.58,718.26)
  other v1: 480,65 525,65 450,105 510,115 245,420 685,425 710,425 245,445 244.85,470.42 1210,530 490,585 519.01,589.21 1210,655 1210,680 1210,705 1210,730 1210,755 1210,780 1210,805 1210,830 1210,855 1210,880 725,900 1210,905 1210,930 1210,955 1210,980 1210,1005 1210,1030 1210,1055
GPIO0: C1.1 Q4.3 SW1.2 U2.23 | length 905.3
  Top Layer w10: U2.23 841.31,540.59 841.31,484.01 926.02,399.29 927.01,399.29 940.32,385.98 940.32,384.02 953.62,370.71 968.34,370.71 999.05,340 SW1.2 1093.35,340 1136.04,382.69 1136.04,765.32 1120,781.36 Q4.3
GPIO2: FPC1.7 U2.22 | length 748.1
  Top Layer w10: FPC1.7 471.82,180.36 471.82,108.18 490,90 590,90 730.29,230.29 730.29,393.45 754.48,417.63 758.1,417.63 789.61,449.14 789.61,459.61 821.11,491.11 U2.22
GPIO4: FPC1.6 U2.24 | length 677.9
  Top Layer w10: FPC1.6 452.14,182.17 452.14,208.56 468.27,224.69 480.48,224.69 531.07,275.29 543.2,275.29 555.57,287.65 555.57,335.57 668.91,448.91 759.69,448.91 v1(761.29,450.51) ; U2.24 860.48,544.49 861,545 v1(895,545)
  Bottom Layer w10: v1(761.29,450.51) 807.13,496.36 807.13,499.47 852.67,545 v1(895,545)
GPIO5: R18.1 U2.34 | length 1070.6
  Top Layer w10: v1(673.94,364.2) 675.85,362.28 675.85,358.48 699.02,335.31 R18.1 ; U2.34 890.51,748.31 910.73,748.31 911.42,749 946.29,749 962.29,765 v1(965,765)
  Bottom Layer w10: v1(673.94,364.2) 672.83,365.31 659.69,365.31 620.57,404.43 620.57,499.43 540.01,579.99 540.01,597.72 535.44,602.28 535.44,604.26 500,639.7 500,741.21 543.79,785 747.73,785 767.73,765 v1(965,765)
GPIO6: D1.K U2.31 | length 126.7
  Top Layer w10: U2.31 919.04,688.74 931.3,701 988.02,701 1004.02,685 D1.K
GPIO7: D4.K U2.32 | length 182.2
  Top Layer w10: U2.32 916.1,708.43 924.67,717 1026.15,717 1035.71,707.45 1035.71,698.31 1049.02,685 D4.K
GPIO8: D5.K U2.33 | length 232.3
  Top Layer w10: U2.33 890.51,728.62 913.67,728.62 918.05,733 1055.15,733 1080.71,707.45 1080.71,698.31 1094.02,685 D5.K
GPIO13: R3.1 SIM1.3 U2.20 | length 531.2
  Top Layer w10: R3.1 405.98,330.31 419.29,343.62 419.29,353.08 468.56,402.35 v1(512.65,402.35) ; v1@515,400 545.69,430.69 605.43,430.69 655.66,480.91 718.61,480.91 723.61,485.91 746.62,485.91 781.23,520.52 U2.20@781.23,540.59
  Bottom Layer w10: SIM1.3 510.91,451.13 510.91,404.09 v1(512.65,402.35)
GPIO14: R4.1 SIM1.5 U2.17 | length 531
  Top Layer w10: R4.1 360.98,330.31 374.29,343.62 374.29,369.29 405,400 v1(430,400) 476.69,446.69 598.8,446.69 649.03,496.91 695.63,496.91 722.17,523.46 722.17,540.59 U2.17
  Bottom Layer w10: SIM1.5 428.09,447.35 428.09,401.91 v1(430,400)
GPIO15: R7.1 SIM1.2 U2.21 | length 510.1
  Top Layer w10: R7.1 457.8,338.43 478.43,338.43 540,400 v1(565,400) 597.37,400 662.29,464.91 725.24,464.91 730.24,469.91 753.25,469.91 800.91,517.57 800.91,540.59 U2.21
  Bottom Layer w10: SIM1.2 553.46,451.9 553.46,414.25 565,402.71 v1(565,400)
GPIO18: FPC1.9 U2.35 | length 1550.7
  Top Layer w10: FPC1.9 510.91,180.91 510.91,208.7 529.35,227.14 553.27,227.14 573.73,247.6 573.73,259.76 v1(575.64,261.67) ; U2.35 890.51,767.99 907.99,767.99 v1(940,800)
  Bottom Layer w10: v1(575.64,261.67) 573.03,261.67 495.24,339.46 276.52,339.46 210.97,405.01 210.97,484.99 526.98,801 939,801 v1(940,800)
GPIO23: FPC1.8 U2.36 | length 1523.5
  Top Layer w10: FPC1.8 491.51,182.17 491.51,213.1 530.78,252.37 548.8,252.37 v1(550.71,254.29) ; U2.36 890,810 v1(910,830)
  Bottom Layer w10: v1(550.71,254.29) 481.54,323.46 269.89,323.46 194.97,398.38 194.97,491.62 520.35,817 894.29,817 907.29,830 v1(910,830)
GPIO26: R2.1 SIM1.7 U2.15 | length 547.8
  Top Layer w10: R2.1 315.98,330.31 329.29,343.62 329.29,382.84 341,394.55 v1(341,397.25) ; v1@340,400 402.69,462.69 592.18,462.69 642.4,512.91 672.26,512.91 682.8,523.46 682.8,540.59 U2.15
  Bottom Layer w10: SIM1.7 339.09,449.73 339.09,399.17 v1(341,397.25)
LCD_BL: FPC1.4 Q3.3 | length 192
  Top Layer w10: FPC1.4 412.77,182.17 412.77,208.56 444.9,240.69 473.85,240.69 504.29,271.14 504.29,297.2 512.09,305 Q3.3
NetD1_A: D1.A R5.1 | length 44.1
  Top Layer w10: R5.1 D1.A
NetD2_A: D2.A R8.1 | length 75.1
  Top Layer w10: D2.A 479.69,854.68 R8.1
NetD3_A: D3.A R9.1 | length 75
  Top Layer w10: D3.A R9.1
NetD4_A: D4.A R12.1 | length 44.1
  Top Layer w10: R12.1 D4.A
NetD5_A: D5.A R14.1 | length 44.1
  Top Layer w10: R14.1 D5.A
NetD6_1: D6.1 USBC1.A4B9 USBC1.B4A9 | length 506.1
  Top Layer w20: USBC1.B4A9 333.54,1373.54 370,1410 490,1410 526.46,1373.54 USBC1.A4B9
  Top Layer w25: USBC1.A4B9 526.66,1289.05 526.66,1231.49 563.15,1195 D6.1
NetD7_A: D7.A R21.2 | length 100.1
  Top Layer w10: R21.2 77.68,1268.31 77.68,1281.69 125,1329.02 D7.A
NetD8_A: D8.A R22.2 | length 55
  Top Layer w20: R22.2 D8.A
NetQ2_1: Q2.1 R16.1 | length 196.7
  Top Layer w10: Q2.1 1027.4,1001.39 1056.56,1030.54 1056.56,1072.85 1099.02,1115.31 R16.1
NetQ3_1: Q3.1 R18.2 | length 64.9
  Top Layer w10: Q3.1 692.91,267.6 R18.2
NetQ4_1: Q4.1 R19.1 | length 320.3
  Top Layer w10: R19.1 1025.98,1115.31 1055.29,1144.62 1123.85,1144.62 1157.4,1111.07 Q4.1
NetR15_1: R15.1 U3.9 | length 131.1
  Top Layer w10: R15.1 560.98,1029.69 602.88,1071.58 602.88,1082.61 634.44,1114.17 649.33,1114.17 U3.9
NetR17_1: R17.1 U3.26 | length 149.5
  Top Layer w10: U3.26 840.67,1094.88 859.88,1094.88 880,1115 937.91,1115 968.07,1084.84 R17.1
NetR23_1: R23.1 U3.25 | length 72.5
  Top Layer w10: U3.25 899.53,1075 R23.1
NetU1_1: U1.1 U2.2 | length 924.8
  Top Layer w15: v3(556.63,754) 563.39,754 576.2,766.81 613.74,766.81 U2.2
  Top Layer w25: v3(1205,585) 1207.87,587.87 1286.85,587.87 U1.1
  Bottom Layer w25: v3(556.63,754) 556.63,751.89 700,608.52 888.22,608.52 928.2,648.5 1141.5,648.5 v3(1205,585)
RTS: Q2.2 R19.2 U3.24 | length 326.7
  Top Layer w10: U3.24 885.11,1055.31 885.21,1055.22 947.91,1055.22 948.01,1055.31 1024.37,1055.31 R19.2 1025,1021.61 972.2,968.82 961.38,968.82 952.6,960.04 Q2.2
U0Rx: R17.2 U2.40 | length 277.5
  Top Layer w10: U2.40 801.42,857.56 931,987.14 968.07,1024.21 R17.2
U0Tx: R23.2 U2.41 | length 260.5
  Top Layer w10: U2.41 781.74,860.51 894.76,973.53 894.76,1010.59 908.07,1023.9 R23.2
U1Rx: CN3.4 D3.K P2.4 U2.39 | length 807.7
  Top Layer w10: CN3.4 253.82,1028.82 P2.4 316.14,1078.86 354.53,1078.86 404.02,1029.37 D3.K 405.98,1029.37 438.44,996.91 443.09,996.91 v1(445,995) ; U2.39 821.62,817.21 821.62,834.34 v1@836.12,848.84
  Bottom Layer w10: v1(445,995) 517.5,922.5 762.5,922.5 v1(836.16,848.84)
U1Tx: CN3.3 D2.K P2.3 U2.42 | length 742.3
  Top Layer w10: CN3.3 190.69,982.31 307.31,982.31 P2.3 366.38,928.62 391.69,928.62 397.66,922.66 402.34,917.97 D2.K 399.69,915.31 v1(395,920) ; U2.42 762.05,891.29 v1(763.03,892.27)
  Bottom Layer w10: v1(395,920) 455,860 730.77,860 v1(763.03,892.27)
pads on no net: FPC1.1 FPC1.14 SIM1.1 SIM1.8 U1.2 U2.5 U2.6 U2.7 U2.8 U2.10 U2.11 U2.14 U2.16 U2.18 U2.25 U2.26 U2.27 U2.30 U2.38 U2.44 U2.45 U2.47 U2.48 U3.0 U3.1 U3.2 U3.6 U3.10 U3.11 U3.12 U3.13 U3.14 U3.15 U3.16 U3.17 U3.18 U3.19 U3.20 U3.21 U3.22 U3.23 U3.27 U4.5 U4.8 USBC1. USBC1.A5 USBC1.A8 USBC1.B5 USBC1.B8

## Polygon pours and split planes (outlines as drawn)
GND on Top Layer "GND_L01_P023" (solid, pour order 23): 5,1570 1175,1570 1175,1070 1225,1070 1225,510 1175,510 1175,5 5,5
+5 on Top Layer "+5_L01_P008" (solid, pour order 8): 990,1295 790,1295 790,1315 670,1315 670,1235 405,1235 405,1155 520,1155 520,1065 580,1065 600,1085 600,1120 675,1120 680,1125 680,1145 695,1145 700,1150 700,1230 990,1230
+3.3 on Top Layer "+3.3_L01_P010" (solid, pour order 10): 1020,1305 810,1305 810,1340 805,1345 670,1345 670,1425 795,1425 795,1465 1020,1465
+3.3A on Top Layer "+3.3A_L01_P000" (solid, pour order 0): 490,795 510,795 510,880 630,880 635,885 635,925 695,925 695,850 755,850 755,795 640,795 640,715 495,715 490,720
GND on Bottom Layer "GND_L02_P024" (solid, pour order 24): 5,1575 1175,1575 1175,1070 1225,1070 1225,510 1175,510 1175,0 5,0
+3.3 on Bottom Layer "+3.3_L02_P015" (solid, pour order 15): 245,305 485,305 485,225 480,220 245,220
+3.3 on Bottom Layer "+3.3_L02_P017" (solid, pour order 17): 535,250 535,215 560,215 560,145 520,145 520,205 515,210 445,210 445,250 460,250
+3.3 on Bottom Layer "+3.3_L02_P018" (solid, pour order 18): 1125,477.72 1125,545 980,545 980,500 1080,500 1080,475 1122.28,475
+3.3 on Bottom Layer "+3.3_L02_P012" (solid, pour order 12): 440,1060 515,1060 515,975 440,975

## Silkscreen, mask and mechanical layers (free items; w line width, h text height)
Top Overlay:
  circle w10: c1084.11,97.69 r98.43
  circle w10: c97.69,97.69 r98.43
  circle w10: c97.69,1477.69 r98.43
  circle w10: c1082.97,1476.87 r98.43
  lines w10: 0,0 97.69,97.69 ; 0,1575 0,1575.38 97.69,1477.69 ; 1082.97,1476.87 1180.66,1574.56 ; 1084.11,97.69 1181.8,0 ; 1181.1,492.13 1181.1,787.4 1181.1,1082.68
  text "5V" at 171,1236 h40
  text "3V3" at 1046,1201 h40
  text "R" at 226,1011 h40
  text "T" at 226,961 h40
  text "G" at 226,911 h40
  text "V" at 226,856 h40
  text "6" at 987.38,738.44 h40
  text "7" at 1034.62,738.44 h40
  text "8" at 1077.38,738.44 h40
  text "L" at 221,686 h40
  text "H" at 221,536 h40
  text "L" at 191,456 h40
  text "ESP Logger V1.0               2022.1.19    /    Designed by Zhang JK     ////////////" at 351.25,392.64 h40
  text "H" at 191,306 h40
  text "EN" at 881,211 h40
  text "IO0" at 1071,211 h40
Bottom Overlay:
  drawing of 8 lines, arcs and shapes, not listed
Mechanical 1:
  lines w10: 1181.12,489.4 1279.59,489.4 1365.41,489.4 1413.32,537.31 1413.32,786.99 1413.32,1036.68 1365.41,1084.59 1279.59,1084.59 1181.12,1084.59 1181.1,1574.8 0,1574.8 0,0 1181.1,0 1181.1,490.67